# Allegro board SSD1332.brd
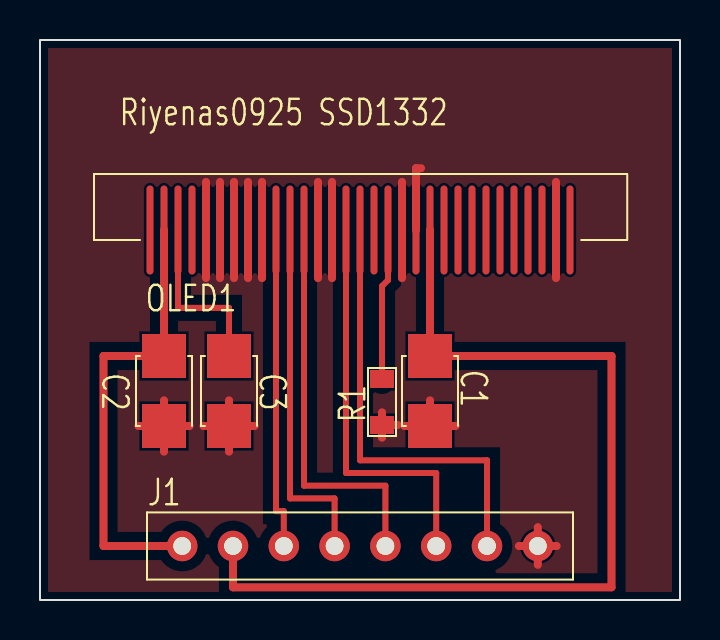
[diagram p0: board, top side]
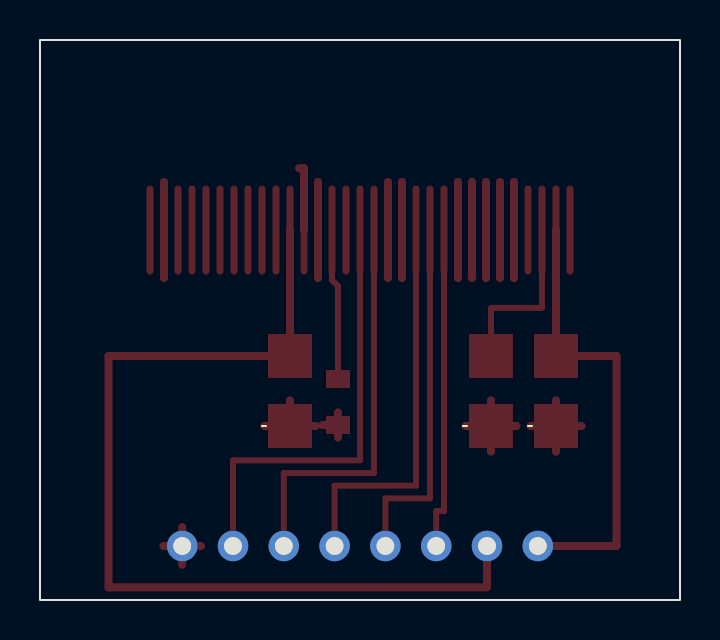
[diagram p1: board, bottom side, seen from below]

Outline 32 x 28 mm; copper layers: TOP, BOTTOM. Coordinates in mm from the lower left corner of the outline.
Outline path: rectangle 0,0 32,28

## Design rules (mm)
nets with their own width: min track width 0.4; nets 3.3V 12V GND

## Placement (name value [footprint] x y rotation side)
C1  4.7uF  [C3528]  19.5 12.2 270 top
C2  4.7uF  [C3528]  6.2 12.2 270 top
C3  4.7uF  [C3528]  9.45 12.2 270 top
J1  HEADER 8  [HIF1X8]  7.11 2.7 0 top
OLED1  -  [SSD1332]  5.5 18.5 0 top
R1  20K  [R2012]  17.1 9.9 90 top

## Library data of the parts
C1 = CAP NP
C2 C3 = CAP POL
J1 = HEADER 8
OLED1 = SSD1332
R1 = RESISTOR

## Footprints (pads in the part's own frame, mm; a bottom-side part is the same pattern mirrored in y, then rotated)
C3528
  rect 2.2x2.2 smd: 1(0,0) 2(3.5,0)
HIF1X8
  round 1.524 hole 0.889: 1(0,0) 2(2.54,0) 3(5.08,0) 4(7.62,0) 5(10.16,0) 6(12.7,0) 7(15.24,0) 8(17.78,0)
R2012
  rect 0.9x1.2 smd: 1(-1.15,0) 2(1.15,0)
SSD1332
  oval 0.35x4.45 smd: 1(0,0) 2(0.7,0) 3(1.4,0) 4(2.1,0) 5(2.8,0) 6(3.5,0) 7(4.2,0) 8(4.9,0) 9(5.6,0) 10(6.3,0) 11(7,0) 12(7.7,0) 13(8.4,0) 14(9.1,0) 15(9.8,0) 16(10.5,0) 17(11.2,0) 18(11.9,0) 19(12.6,0) 20(13.3,0) 21(14,0) 22(14.7,0) 23(15.4,0) 24(16.1,0) 25(16.8,0) 26(17.5,0) 27(18.2,0) 28(18.9,0) 29(19.6,0) 30(20.3,0) 31(21,0)

## Nets
3.3V: C1.1 J1.2 OLED1.21(VDD)
12V: C2.1 J1.1 OLED1.2(VCC)
GND: C1.2 C2.2 C3.2 J1.8 OLED1.5(D7) OLED1.6(D6) OLED1.7(D5) OLED1.8(D4) OLED1.9(D3) OLED1.13(E(RD)) OLED1.14(RE(WR)) OLED1.19(BS2) OLED1.20(BS1) OLED1.30(VSS) R1.1
N00588: OLED1.18(IREF) R1.2
N00749: C3.1 OLED1.3(VCOMH)
N02596: J1.3 OLED1.10(D2)
N02600: J1.4 OLED1.11(D1)
N02604: J1.5 OLED1.12(D0)
N02608: J1.6 OLED1.15(DC)
N02612: J1.7 OLED1.16(RES)

Pads without a net: OLED1 1 4 17 22 23 24 25 26 27 28 29 31

## Routing (per net, layer and track width the routed paths; a pad name or vN(x,y) marks a point on that pad's centre or on a via; arc(x,y) is an arc through that point)
3.3V: length 47.9
  TOP w0.4: OLED1.21 C1.1 28.57,12.2 28.57,0.64 9.65,0.64 J1.2
12V: length 22.8
  TOP w0.4: J1.1 3.17,2.7 3.17,12.2 C2.1 OLED1.2
GND: length 66.5
  TOP w0.4: 14.6,20.91 OLED1.14 14.6,16.09 ; J1.8 25.83,2.7 ; J1.8 24.89,3.64 ; J1.8 23.95,2.7 ; J1.8 24.89,1.76 ; 10.4,20.91 OLED1.8 10.4,16.09 ; 19.05,21.59 18.8,21.59 OLED1.20 ; 18.1,20.91 OLED1.19 18.1,16.09 ; 13.9,16.09 OLED1.13 13.9,20.91 ; 17.1,8.12 R1.1 ; R1.1 17.88,8.75 ; R1.1 17.1,9.38 ; 9.7,20.91 OLED1.7 9.7,16.09 ; 9,20.91 OLED1.6 9,16.09 ; 4.92,8.7 C2.2 ; C2.2 6.2,7.42 ; C2.2 7.48,8.7 ; C2.2 6.2,9.98 ; 9.45,7.42 C3.2 ; C3.2 10.73,8.7 ; C3.2 8.17,8.7 ; C3.2 9.45,9.98 ; 11.1,20.91 OLED1.9 11.1,16.09 ; 8.3,20.91 OLED1.5 8.3,16.09 ; 25.8,20.91 OLED1.30 25.8,16.09 ; C1.2 19.5,9.98 ; C1.2 20.78,8.7 ; C1.2 18.22,8.7
N00588: length 7.7
  TOP w0.3: 17.1,10.95 R1.2 17.1,11.78 17.1,11.78 17.1,15.7 17.4,15.99 OLED1.18
N00749: length 8.8
  TOP w0.3: OLED1.3 6.9,14.61 9.45,14.61 C3.1
N02596: length 16.2
  TOP w0.3: J1.3 12.19,4.45 11.8,4.45 OLED1.10
N02600: length 18
  TOP w0.3: J1.4 14.73,5.08 12.5,5.08 OLED1.11
N02604: length 19.9
  TOP w0.3: OLED1.12 13.2,5.71 17.27,5.71 J1.5
N02608: length 20.3
  TOP w0.3: OLED1.15 15.3,6.35 19.81,6.35 J1.6
N02612: length 22.2
  TOP w0.3: J1.7 22.35,6.99 16,6.99 OLED1.16

## Copper pours and planes (outline as drawn; the poured copper is in the pictures)
GND on TOP: 0.4,0.4 0.4,27.6 31.6,27.6 31.6,0.4 ; 9 cut-outs

## Text on the board
Ref Des/Silkscreen Top: Riyenas0925 SSD1332
NCLEGEND-1-2: FIGURE | SIZE | 0.889 | DRILL CHART: TOP to BOTTOM | ALL UNITS ARE IN MILLIMETERS | PLATED | QTY | 8
